# EAGLE board MSPBOIADV (EAGLE 9.3.0)
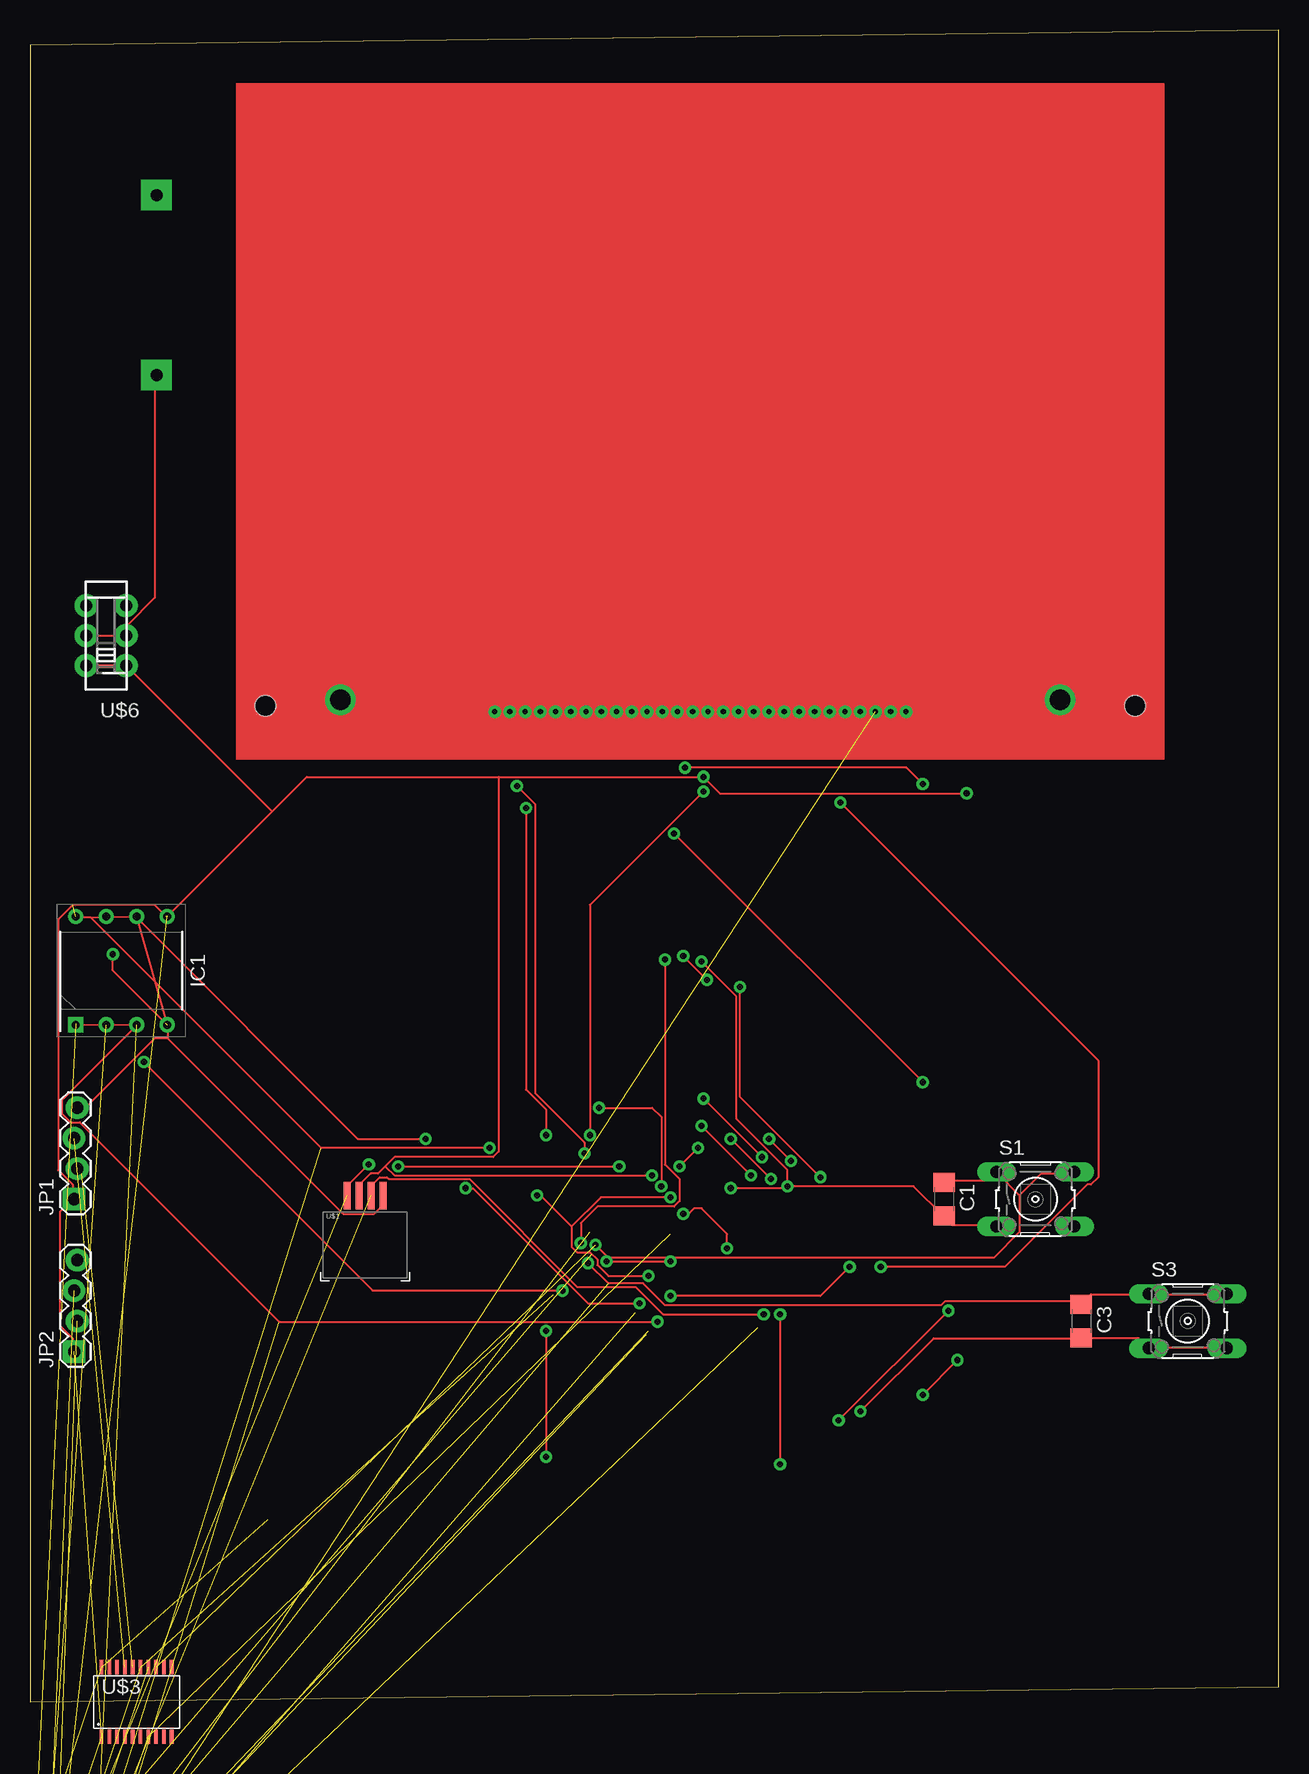
[diagram p0: board, top side]
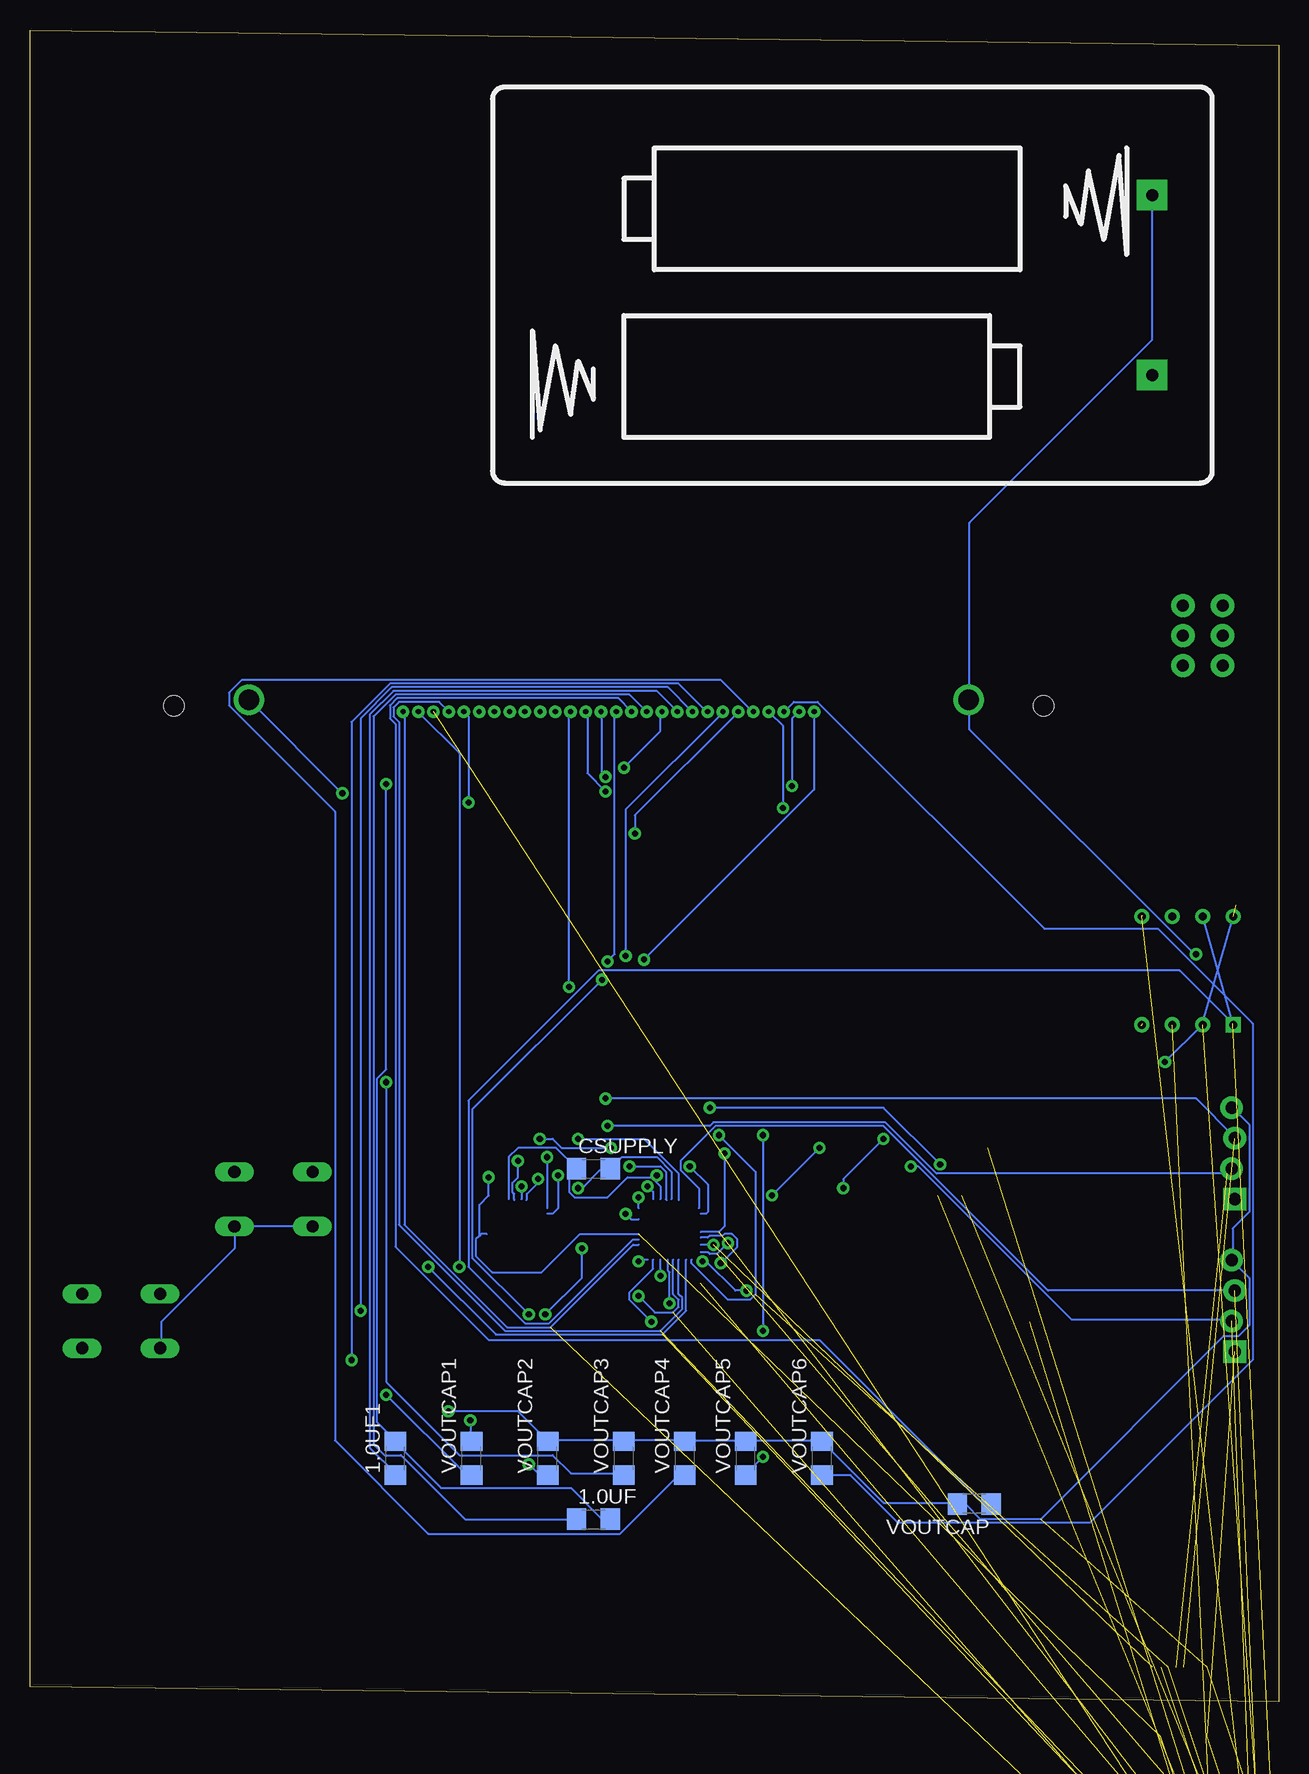
[diagram p1: board, bottom side, seen from below]

Size 104.12 x 139.37 mm. Coordinates in mm from the lower left corner, seen from the top.
Outline: 0,0 104.12,1.27 104.12,139.37 0,138.1 0,0
Copper layers (1*16): Top 0.035mm / dielectric 1.5mm / Bottom 0.035mm
Design rules "AdvancedCircuitsBarebones": minimum track width 6mil, minimum drill 20mil, track to track 6mil, track to pad 6mil, pad to pad 6mil, via to via 6mil, smd to smd 6mil, copper to edge 10mil, drill to drill 6mil, minimum pad ring 12mil, minimum via ring 10mil, stop-mask expansion 4mil, vias tented up to drill 25mil, thermal gap 10mil

## Footprints (pad centres in the part's own frame; a part is rotated, then mirrored left to right if it is on the bottom)
C1206 = smd 1.6 x 1.8: 1 -1.4,0; 2 1.4,0
BATTERY_PACK_2AA = drill 1 pad 2.54 square: 3V 7.5,25; GND -7.5,25
DIP902W46P254L959H533Q8N = drill 0.66 pad 1.06 square: 1 -4.51,3.81 | drill 0.66 pad 1.06: 2 -4.51,1.27; 3 -4.51,-1.27; 4 -4.51,-3.81; 5 4.51,-3.81; 6 4.51,-1.27; 7 4.51,1.27; 8 4.51,3.81
1X04_LOCK = drill 1.016 pad 1.88 square: 1 0,0.127 | drill 1.016 pad 1.88: 2 2.54,-0.127; 3 5.08,0.127; 4 7.62,-0.127
B3F-10XX = drill 1.016 long: 1 -3.251,2.261; 2 3.251,2.261; 3 -3.251,-2.261; 4 3.251,-2.261
PSP_TOUCH_CONNECTOR = smd 0.6 x 2.3: X1 1.5,2.85; X2 -0.5,2.85; Y1 -1.5,2.85; Y2 0.5,2.85
DISPLAY_128_64 = drill 1.7: P$1 30,1; P$2 -30,1 | drill 0.44: P$3 -17.145,0; P$4 -15.875,0; P$5 -14.605,0; P$6 -13.335,0; P$7 -12.065,0; P$8 -10.795,0; P$9 -9.525,0; P$10 -8.255,0; P$11 -6.985,0; P$12 -5.715,0; P$13 -4.445,0; P$14 -3.175,0; P$15 -1.905,0; P$16 -0.635,0; P$17 0.635,0; P$18 1.905,0; P$19 3.175,0; P$20 4.445,0; P$21 5.715,0; P$22 6.985,0; P$23 8.255,0; P$24 9.525,0; P$25 10.795,0; P$26 12.065,0; P$27 13.335,0; P$28 14.605,0; P$29 15.875,0; P$30 17.145,0 | hole 1.7: -36.25,0.5; 36.25,0.5
PW20 = smd 0.3 x 1.2: 1 -2.925,-2.9; 2 -2.275,-2.9; 3 -1.625,-2.9; 4 -0.975,-2.9; 5 -0.325,-2.9; 6 0.325,-2.9; 7 0.975,-2.9; 8 1.625,-2.9; 9 2.275,-2.9; 10 2.925,-2.9; 11 2.925,2.9; 12 2.275,2.9; 13 1.625,2.9; 14 0.975,2.9; 15 0.325,2.9; 16 -0.325,2.9; 17 -0.975,2.9; 18 -1.625,2.9; 19 -2.275,2.9; 20 -2.925,2.9
PW28 = smd 0.3 x 1.2: 1 -4.229,-2.908; 2 -3.579,-2.908; 3 -2.929,-2.908; 4 -2.279,-2.908; 5 -1.629,-2.908; 6 -0.979,-2.908; 7 -0.329,-2.908; 8 0.321,-2.908; 9 0.971,-2.908; 10 1.621,-2.908; 11 2.271,-2.908; 12 2.921,-2.908; 13 3.571,-2.908; 14 4.221,-2.908; 15 4.221,2.892; 16 3.571,2.892; 17 2.921,2.892; 18 2.271,2.892; 19 1.621,2.892; 20 0.971,2.892; 21 0.321,2.892; 22 -0.329,2.892; 23 -0.979,2.892; 24 -1.629,2.892; 25 -2.279,2.892; 26 -2.929,2.892; 27 -3.579,2.892; 28 -4.229,2.892
JS_DPDT_TH = drill 1 pad 1.93: 1 -2.5,-1.65; 2 0,-1.65; 3 2.5,-1.65; 4 -2.5,1.65; 5 0,1.65; 6 2.5,1.65

## Placement (x,y rotation side)
1.0UF  1.0uF  [C1206]  57.15,15.24 0 bottom
1.0UF1  1.0uF  [C1206]  73.66,20.32 90 bottom
BAT1  [BATTERY_PACK_2AA]  35.56,118.11 270 bottom
C1  [C1206]  76.2,41.91 270 top
C3  [C1206]  87.63,31.75 270 top
CSUPPLY  [C1206]  57.15,44.45 0 bottom
IC1  W25Q32JVDAIQ  [DIP902W46P254L959H533Q8N]  7.62,60.96 90 top
JP1  [1X04_LOCK]  3.81,41.91 90 top
JP2  [1X04_LOCK]  3.81,29.21 90 top
S1  [B3F-10XX]  83.82,41.91 0 top
S3  [B3F-10XX]  96.52,31.75 0 top
U$1  PSP_TOUCH_CONNECTOR  [PSP_TOUCH_CONNECTOR]  27.94,39.37 0 top
U$2  SCREEN  [DISPLAY_128_64]  55.88,82.55 0 bottom
U$3  MSP430G2XX3TSSOP  [PW20]  8.89,0 0 top
U$5  USETHIS  [PW28]  3.81,-19.05 0 top  (outside the outline)
U$6  SWITCH_DPDT  [JS_DPDT_TH]  6.35,88.9 90 top
VOUTCAP  1.0uF  [C1206]  25.4,16.51 180 bottom
VOUTCAP1  1.0uF  [C1206]  67.31,20.32 90 bottom
VOUTCAP2  1.0uF  [C1206]  60.96,20.32 90 bottom
VOUTCAP3  1.0uF  [C1206]  54.61,20.32 90 bottom
VOUTCAP4  1.0uF  [C1206]  49.53,20.32 90 bottom
VOUTCAP5  1.0uF  [C1206]  44.45,20.32 90 bottom
VOUTCAP6  1.0uF  [C1206]  38.1,20.32 90 bottom

## Library data of the parts
1.0UF 1.0UF1 C1 C3 VOUTCAP VOUTCAP1-VOUTCAP6 = rcl; SPICEPREFIX: C
BAT1 U$3 U$6 = ELEC327
CSUPPLY = rcl
IC1 = W25Q32JVDAIQ; DESCRIPTION: NOR Flash spiFlash, 32M-bit, DTR, 4Kb Uniform Sector; HEIGHT: 5.33mm; MANUFACTURER_NAME: Winbond; MANUFACTURER_PART_NUMBER: W25Q32JVDAIQ
JP1 JP2 U$1 = SparkFun
S1 S3 = switch-omron; MPN: B3F-1000; OC_FARNELL: 176432; OC_NEWARK: 36M3542
U$2 = gameconsole
U$5 = TI_MSP430_v16

## Nets
A0: U$2.P$5 U$5.18
BAT_VCC: BAT1.3V U$6.2 U$6.5
BTN1: C3.1 S3.1 S3.2 U$5.20
BTN2: C1.1 S1.1 S1.2 U$3.13
C86: U$2.P$29 U$5.21
CAP1+: 1.0UF1.1 U$2.P$21
CAP1-: 1.0UF1.2 1.0UF.2 U$2.P$20
CAP2+: U$2.P$22 VOUTCAP1.2
CAP2-: U$2.P$23 VOUTCAP1.1
CAP3+: 1.0UF.1 U$2.P$19
CHP_SLCT: U$3.8
CS1: U$2.P$3 U$5.9
CS_FLASH: IC1.1 U$5.8
DB0: U$2.P$8
DB1: U$2.P$9
DB2: U$2.P$10
DB3: U$2.P$11
DB4: U$2.P$12
DB5: U$2.P$13
E/RD: U$2.P$7 U$5.16
GND: BAT1.GND C1.2 C3.2 CSUPPLY.2 IC1.4 JP1.4 JP2.4 S1.3 S1.4 S3.3 S3.4 U$1.X1 U$2.P$1 U$2.P$17 U$3.20 U$5.28 VOUTCAP2.2 VOUTCAP3.2 VOUTCAP4.2 VOUTCAP5.2 VOUTCAP6.2 VOUTCAP.2
HOLD: IC1.7 U$5.10 U$5.27
N$11: U$5.11
N$12: U$5.12
N$13: U$5.13
N$14: U$5.14
O_CLK: IC1.6 U$5.6
O_SIMO: IC1.5 U$5.4
O_SOMI: IC1.2 U$5.3
P/S: U$2.P$30 U$5.26
RES: U$2.P$4 U$5.15
RST: JP1.2 U$3.16
RST2: JP2.2 U$5.24
RW/WR: U$2.P$6 U$5.17
S_CLK_SPI: U$2.P$14 U$3.7 U$5.7
S_SIMO: U$2.P$15 U$3.15 U$5.23
S_SOMI: U$3.14 U$5.22
TEST: JP1.3 U$3.17
TEST2: JP2.3 U$5.25
V0: U$2.P$28 VOUTCAP6.1
V1: U$2.P$27 VOUTCAP5.1
V2: U$2.P$26 VOUTCAP4.1
V3: U$2.P$25 VOUTCAP3.1
V4: U$2.P$24 VOUTCAP2.1
VCC: CSUPPLY.1 IC1.8 JP1.1 JP2.1 U$1.X2 U$2.P$2 U$2.P$16 U$3.1 U$5.1 U$6.1 U$6.4
VOUT: U$2.P$18 VOUTCAP.1
WRITE_PROTC: IC1.3 U$5.19
X: U$1.Y1 U$5.2
Y: U$1.Y2 U$5.5

## Tracks (layer width: path | path; a pad name or v marks a point on that pad's centre or on a via)
A0  (1 unrouted)
AVCC  (via drill 0.51)
  Top 0.152: v55.68,46.18 v54.15,44.65 | v63.45,45.11 v61.62,46.94
  Bottom 0.152: v54.15,44.65 51.56,44.65 51.11,44.2 51.11,41.91 51.05,41.84 | v55.68,46.18 59.79,46.18 60.55,46.94 v61.62,46.94 | v63.45,45.11 63.45,43.74 63.91,43.28 63.91,42.52 63.75,42.37 63.75,41.91 63.75,41.84
AVSS  (via drill 0.51)
  Top 0.152: v61.77,43.59 v58.42,46.94
  Bottom 0.152: v58.42,46.94 52.93,46.94 50.04,44.04 50.04,41.91 50.05,41.84 | v61.77,43.59 61.77,43.28 62.69,42.37 62.69,41.91 62.75,41.84
BAT_VCC
  Top 0.152: U$6.5 4.78,88.85 7.98,88.85 U$6.2 8.13,89 8.13,89.76 10.41,92.05 10.41,110.49 BAT1.3V
BTN1  (via drill 0.51)  (1 unrouted)
  Top 0.152: v46.53,36.58 48.21,34.9 51.11,34.9 52.93,33.07 75.95,33.07 76.25,33.38 87.38,33.38 87.53,33.22 C3.1 87.68,33.22 88.44,33.98 93.17,33.98 S3.1 93.32,33.98 99.72,33.98 S3.2
  Bottom 0.152: 48.21,38.71 47.6,38.71 47.45,38.86 46.38,38.86 46.23,39.01 45.62,39.01 45.16,38.56 45.16,37.95 v46.53,36.58
BTN2  (via drill 0.51)  (1 unrouted)
  Top 0.152: v47.14,38.1 48.21,37.03 80.37,37.03 82.5,39.17 82.5,42.22 | 82.5,42.22 80.67,44.04 S1.1 80.52,44.04 79.91,43.43 76.25,43.43 C1.1 | 82.5,42.22 84.33,44.04 87.07,44.04 S1.2
  Bottom 0.152: v47.14,38.1 48.21,38.1
C86  (via drill 0.51)  (1 unrouted)
  Top 0.152: v46.23,45.72 46.23,46.63 42.11,50.75 42.11,74.83 v40.59,76.35
  Bottom 0.152: 48.21,39.17 46.69,39.17 46.23,39.62 v46.23,45.72 | v40.59,76.35 40.59,81.99 40.13,82.45 U$2.P$29
CAP1+
  Bottom 0.152: 1.0UF1.1 73.66,19.05 75.79,21.18 75.79,82.3 73.81,84.28 51.87,84.28 50.19,82.6 U$2.P$21
CAP1-  (via drill 0.51)
  Top 0.152: v54.61,77.88 73.05,77.88 v74.42,76.5
  Bottom 0.152: 1.0UF.2 56.44,15.24 59.03,17.83 69.85,17.83 73.66,21.64 1.0UF1.2 73.66,21.79 75.18,23.32 75.18,51.97 74.42,52.73 v74.42,76.5 | v54.61,77.88 51.56,80.92 51.56,82.45 U$2.P$20
CAP2+  (via drill 0.51)
  Top 0.152: v76.56,32.61 v67.41,23.47
  Bottom 0.152: v67.41,23.47 67.41,21.79 VOUTCAP1.2 | v76.56,32.61 76.56,81.99 73.96,84.58 50.95,84.58 48.97,82.6 U$2.P$22
CAP2-  (via drill 0.51)
  Top 0.152: v77.32,28.5 v74.42,25.6
  Bottom 0.152: v74.42,25.6 67.87,19.05 67.41,19.05 VOUTCAP1.1 | v77.32,28.5 77.32,81.69 74.12,84.89 50.04,84.89 47.75,82.6 U$2.P$23
CAP3+
  Bottom 0.152: 1.0UF.1 67.87,15.24 73.2,20.57 74.57,20.57 75.49,21.49 75.49,82.14 73.66,83.97 54.15,83.97 52.78,82.6 U$2.P$19
CS1  (1 unrouted)
  Bottom 0.152: 53.39,38.1 53.85,38.1 60.71,31.24 64.36,31.24 72.9,39.78 72.9,82.45 U$2.P$3
CS_FLASH  (via drill 0.51)  (1 unrouted)
  Top 0.152: v52.32,31.7 20.78,31.7 4.17,48.31 3.4,48.31 2.64,49.07 2.64,50.14 8.89,56.39 IC1.1
  Bottom 0.152: 52.17,36.88 52.17,36.12 54.15,34.14 54.15,33.53 v52.32,31.7
E/RD  (via drill 0.51)  (1 unrouted)
  Top 0.152: v70.92,36.27 81.28,36.27 88.14,43.13 88.44,43.13 89.05,43.74 89.05,53.49 v67.56,74.98
  Bottom 0.152: 49.43,36.88 49.43,32.61 51.41,30.63 65.28,30.63 v70.92,36.27 | v67.56,74.98 67.56,82.14 67.87,82.45 U$2.P$7
GND  (via drill 0.51)  (4 unrouted)
  Top 0.152: S3.4 99.72,29.57 93.32,29.57 S3.3 93.17,29.57 92.4,30.33 87.68,30.33 C3.2 87.53,30.33 75.34,30.33 v69.24,24.23 | v63.14,42.98 73.66,42.98 76.1,40.54 C1.2 76.25,40.39 76.86,39.78 80.52,39.78 S1.3 | v55.98,61.72 58.88,58.83 58.88,48.62 63.14,44.35 v63.14,42.98 | v58.42,42.82 62.99,42.82 v63.14,42.98 | 11.48,55.32 26.11,40.69 28.7,40.69 29.31,41.3 29.31,42.22 U$1.X1 | 11.48,56.39 11.48,55.32 | JP1.4 4.62,49.53 10.41,55.32 11.48,55.32 | v6.91,62.33 6.91,60.96 11.33,56.54 | v50.8,33.22 46.53,33.22 36.93,42.82 v36.32,42.82 | v32.97,46.94 27.33,46.94 8.89,65.38 IC1.4
  Bottom 0.152: 50.65,41.91 50.65,44.2 51.87,45.41 54.76,45.41 55.68,44.5 CSUPPLY.2 55.83,44.35 56.59,44.35 58.12,42.82 v58.42,42.82 | v63.14,42.98 63.14,41.91 | v55.98,61.72 55.37,62.33 55.37,82.45 U$2.P$17 | 87.07,39.62 80.67,39.62 S1.3 | 87.07,39.62 87.07,37.8 93.17,31.7 93.17,29.57 S3.3 | 87.07,39.62 S1.4 | BAT1.GND 10.57,125.58 10.57,113.54 25.81,98.3 25.81,83.67 U$2.P$1 25.81,83.52 25.81,81.08 7.06,62.33 v6.91,62.33 | 54.61,21.79 49.58,21.79 VOUTCAP4.2 49.43,21.79 44.55,21.79 VOUTCAP5.2 44.4,21.79 38.15,21.79 VOUTCAP6.2 38,21.64 32.97,16.61 26.87,16.61 VOUTCAP.2 26.72,16.46 26.11,16.46 24.89,15.24 19.86,15.24 4.62,30.48 3.4,30.48 2.49,31.39 2.49,35.36 3.86,36.73 JP2.4 3.86,36.88 3.86,39.47 2.49,40.84 2.49,48.16 3.86,49.53 JP1.4 | 54.61,21.79 60.86,21.79 VOUTCAP2.2 61.01,21.79 63.45,24.23 v69.24,24.23 | 54.61,21.79 VOUTCAP3.2 | 50.95,36.88 50.95,35.97 50.8,35.81 v50.8,33.22 | v36.32,42.82 36.32,43.59 v32.97,46.94
HOLD  (2 unrouted)
  Bottom 0.152: 53.39,38.56 53.85,38.56 60.86,31.55 62.84,31.55 67.56,36.27 67.56,50.14 56.74,60.96 8.28,60.96 3.86,56.54 IC1.7
O_CLK  (via drill 0.51)  (1 unrouted)
  Top 0.152: v51.56,35.51 48.21,35.51 47.3,36.42 47.3,36.88 46.69,37.49 45.62,37.49 45.16,37.95 45.16,39.62 | 45.16,39.62 47.6,42.06 v53.39,42.06 | v38.3,46.18 24.28,46.18 5.08,65.38 3.86,65.38 IC1.6 | v42.27,42.22 42.57,42.22 45.16,39.62
  Bottom 0.152: v51.56,35.51 51.56,36.88 | 53.39,41.15 v53.39,42.06 | v42.27,42.22 v38.3,46.18
O_SIMO  (1 unrouted)
O_SOMI  (1 unrouted)
P/S  (via drill 0.51)  (1 unrouted)
  Top 0.152: v45.92,38.25 45.92,39.93 47.3,41.3 53.7,41.3 54.15,41.76 54.15,43.59 52.93,44.81 v52.93,61.87
  Bottom 0.152: 48.21,37.49 47.6,37.49 47.45,37.34 46.84,37.34 v45.92,38.25 | v52.93,61.87 38.76,76.05 38.76,82.45 U$2.P$30
RES  (via drill 0.51)  (1 unrouted)
  Top 0.152: v53.39,33.83 65.89,33.83 v68.33,36.27
  Bottom 0.152: 50.49,36.88 50.49,33.98 50.04,33.53 50.04,32.92 50.49,32.46 52.02,32.46 v53.39,33.83 | v68.33,36.27 68.33,79.1 71.68,82.45 U$2.P$4
RST  (via drill 0.51)  (1 unrouted)
  Top 0.152: v55.98,48.01 v60.1,43.89
  Bottom 0.152: 61.01,40.69 60.55,40.69 60.1,41.15 v60.1,43.89 | v55.98,48.01 47.45,48.01 47.14,48.31 32.82,48.31 28.55,44.04 4.32,44.04 4.01,44.35 JP1.2
RST2  (via drill 0.51)  (1 unrouted)
  Top 0.152: v30.68,44.65 v49.12,44.65
  Bottom 0.152: 48.21,40.69 47.75,40.69 47.6,40.84 47.6,43.13 v49.12,44.65 | v30.68,44.65 30.07,44.65 17.27,31.85 4.01,31.85 JP2.2
RW/WR  (1 unrouted)
  Bottom 0.152: 50.04,36.88 50.04,33.98 49.73,33.68 49.73,32.77 51.56,30.94 64.52,30.94 73.35,39.78 73.35,81.69 73.81,82.14 73.81,82.91 73.35,83.36 70,83.36 69.24,82.6 U$2.P$6
S_CLK_SPI  (via drill 0.51)  (2 unrouted)
  Top 0.152: v59.18,59.59 59.18,50.44 v65.89,43.74
  Bottom 0.152: 53.39,39.01 58.27,39.01 61.47,35.81 65.58,35.81 66.95,37.19 66.95,38.56 66.65,38.86 | 66.65,38.86 66.5,39.01 66.04,39.01 | v59.18,59.59 59.18,82.45 U$2.P$14 | v65.89,43.74 65.89,42.22 66.65,41.45 66.65,38.86
S_SIMO  (via drill 0.51)  (2 unrouted)
  Top 0.152: v46.69,47.24 46.69,66.45 v56.13,75.89
  Bottom 0.152: 48.97,36.88 48.97,36.58 45.92,33.53 44.09,33.53 43.64,33.98 43.64,44.2 v46.69,47.24 | v56.13,75.89 57.66,77.42 57.66,82.45 U$2.P$15
S_SOMI  (1 unrouted)
TEST  (via drill 0.51)  (1 unrouted)
  Top 0.152: v56.13,50.29 v61.01,45.41
  Bottom 0.152: v61.01,45.41 61.01,41.15 | v56.13,50.29 6.91,50.29 3.71,47.09 JP1.3
TEST2  (1 unrouted)
  Bottom 0.152: 48.36,41.15 48.36,42.82 49.89,44.35 49.89,45.11 46.99,48.01 32.97,48.01 19.25,34.29 JP2.3
V0
  Bottom 0.152: VOUTCAP6.1 38,18.9 35.71,18.9 31.75,14.94 15.75,14.94 2.18,28.5 2.18,56.54 10.11,64.47 19.56,64.47 38.46,83.36 40.44,83.36 41.2,82.6 U$2.P$28
V1  (via drill 0.51)
  Top 0.152: v43.03,30.94 v43.03,20.42 | v43.03,47.24 43.03,49.38 41.35,51.05 v41.35,74.52
  Bottom 0.152: v43.03,20.42 44.4,19.05 VOUTCAP5.1 | v43.03,47.24 v43.03,30.94 | v41.35,74.52 41.35,81.38 42.42,82.45 U$2.P$27
V2
  Bottom 0.152: VOUTCAP4.1 49.58,18.9 50.04,18.9 54.91,14.02 70.92,14.02 78.69,21.79 78.69,74.22 87.53,83.06 87.53,84.12 86.46,85.19 46.53,85.19 43.94,82.6 U$2.P$26
V3  (via drill 0.51)
  Top 0.152: v53.7,72.39 v74.42,51.66
  Bottom 0.152: v74.42,51.66 74.42,26.67 68.33,20.57 60.55,20.57 59.03,19.05 54.61,19.05 VOUTCAP3.1 | v53.7,72.39 53.7,73.91 45.16,82.45 U$2.P$25
V4  (via drill 0.51)
  Top 0.152: v62.54,32.31 v62.54,19.81 | v54.46,62.18 v56.44,60.2
  Bottom 0.152: v62.54,19.81 61.77,19.05 61.01,19.05 VOUTCAP2.1 | v62.54,32.31 67.26,37.03 67.26,49.38 v56.44,60.2 | v54.46,62.18 54.46,74.37 46.38,82.45 U$2.P$24
VCC  (via drill 0.51)  (4 unrouted)
  Top 0.152: 3.56,41.91 2.49,40.84 2.49,31.39 3.56,30.33 3.56,29.26 JP2.1 | U$6.4 4.78,86.41 7.98,86.41 U$6.1 8.13,86.26 20.17,74.22 | 39.06,77.11 23.06,77.11 20.17,74.22 | 39.06,77.11 v56.13,77.11 57.51,75.74 v78.08,75.74 | 11.48,65.53 20.17,74.22 | 29.62,44.65 30.38,45.41 38.61,45.41 39.06,45.87 39.06,77.11 | 29.62,44.65 29.01,44.04 28.4,44.04 27.48,43.13 27.48,42.37 U$1.X2 | v51.87,43.89 30.38,43.89 29.62,44.65 | 3.56,41.91 3.56,43.13 2.34,44.35 2.34,65.23 3.56,66.45 10.41,66.45 11.33,65.53 | 3.56,41.91 JP1.1 | v48.06,36.73 v53.39,36.73 | v44.4,34.29 28.55,34.29 v9.5,53.34
  Bottom 0.152: 51.56,41.91 51.56,42.98 52.17,43.59 | 52.17,43.59 52.32,43.74 54.3,43.74 55.98,42.06 58.73,42.06 59.18,42.52 59.18,43.74 58.57,44.35 CSUPPLY.1 58.57,44.5 60.25,46.18 63.45,46.18 64.21,45.41 64.21,41.91 | v56.13,77.11 56.44,77.42 56.44,82.45 U$2.P$16 | v78.08,75.74 85.85,83.52 U$2.P$2 | v51.87,43.89 52.17,43.59 | 52.63,36.88 53.24,36.88 v53.39,36.73 | v48.06,36.73 47.75,36.73 45.31,34.29 v44.4,34.29 | v9.5,53.34 6.45,56.39 IC1.8
VOUT
  Bottom 0.152: VOUTCAP.1 24.13,16.61 24.74,16.61 38.3,30.18 65.89,30.18 73.66,37.95 73.66,81.53 74.12,81.99 74.12,83.06 73.51,83.67 55.07,83.67 54,82.6 U$2.P$18
WRITE_PROTC  (1 unrouted)
X  (via drill 0.51)  (1 unrouted)
  Top 0.152: v52.63,42.98 52.63,48.77 51.87,49.53 v47.45,49.53 | v28.25,44.81 26.57,43.13 26.57,42.37 U$1.Y1
  Bottom 0.152: 52.17,41.91 52.17,42.52 v52.63,42.98 | v47.45,49.53 32.97,49.53 v28.25,44.81
Y  (via drill 0.51)  (1 unrouted)
  Top 0.152: v54.46,40.69 54.91,40.69 55.37,41.15 55.98,41.15 58.12,39.01 v58.12,37.8 | v61.16,32.31 52.78,32.31 50.49,34.59 45.62,34.59 36.63,43.59 29.92,43.59 29.77,43.74 29.16,43.74 28.55,43.13 28.55,42.37 U$1.Y2
  Bottom 0.152: 53.39,40.23 54,40.23 v54.46,40.69 | v58.12,37.8 58.12,35.36 v61.16,32.31